# Altium PCB 400631.PcbDoc (part 5 of 8)
Units mm, origin at the board's own origin, x right, y up, seen from the top; angles counter-clockwise.
Board outline 136.53 x 63.5 mm, 4 copper layers (Top Layer, Mid-Layer 1, Mid-Layer 2, Bottom Layer), stack 1.52 mm thick; 366 components, 256 nets, 1485 pads, 1968 vias.
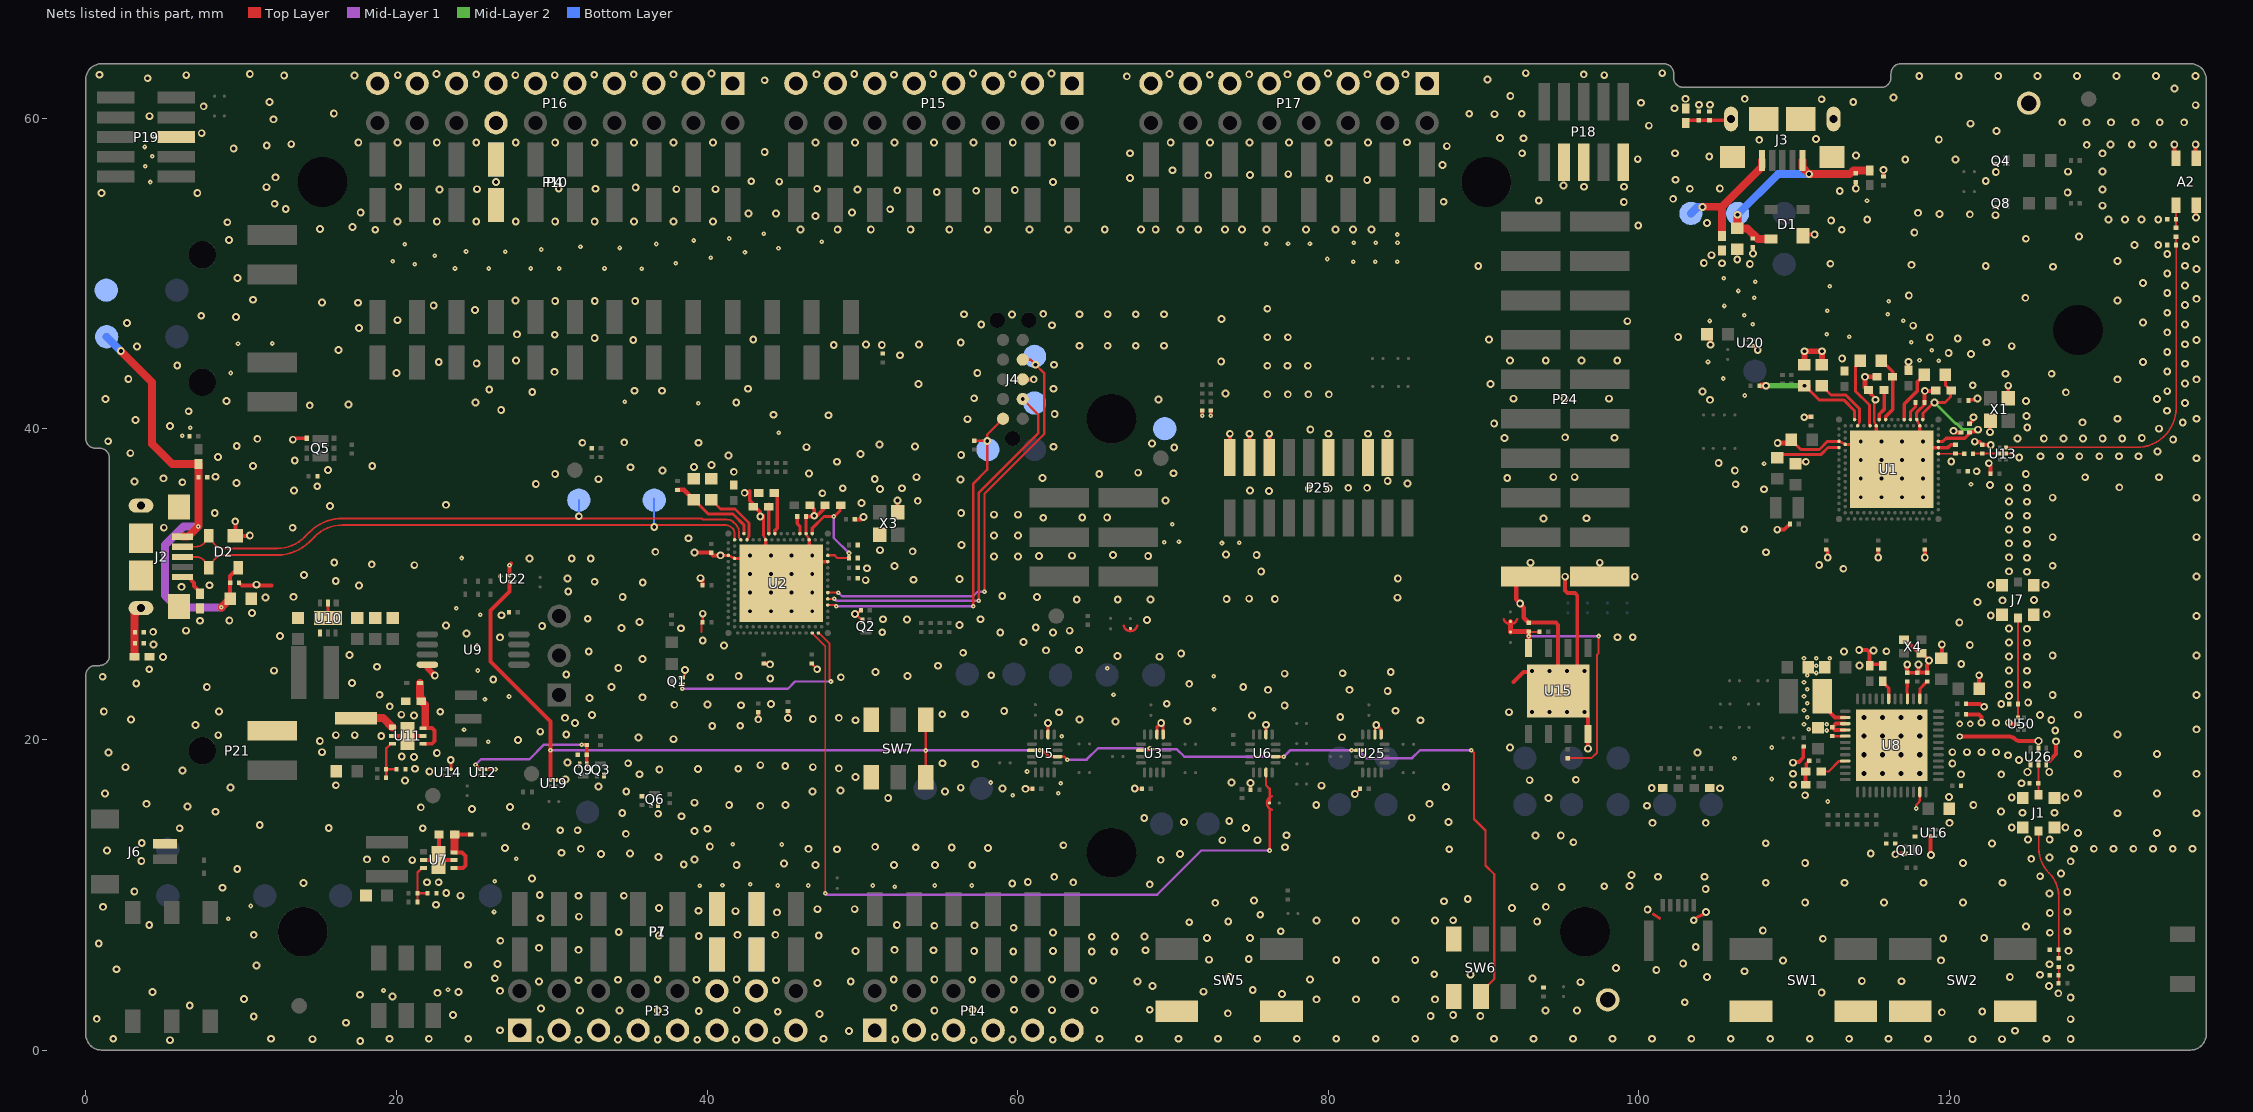
[diagram p5: the nets of this part, all layers, seen from the top]

## Via types
v1: diameter 0.5, hole 0.25, Top Layer to Bottom Layer, tented both sides, 1516 vias
v2: diameter 0.3, hole 0.1, Top Layer to Mid-Layer 1, tented top, 354 vias
v3: diameter 0.3, hole 0.1, Top Layer to Mid-Layer 1, tented both sides, 67 vias
v4: diameter 0.66, hole 0.33, Top Layer to Bottom Layer, tented both sides, 16 vias
v5: diameter 0.4, hole 0.2, Top Layer to Bottom Layer, tented both sides, 11 vias
v6: diameter 0.5, hole 0.3, Top Layer to Bottom Layer, tented both sides, 3 vias
v7: diameter 0.6, hole 0.3, Top Layer to Bottom Layer, tented both sides, 1 vias

## Nets (pads, with @x,y where several pads share a name; then routed paths per layer and width w, separated by ;. In a path a pad name is that pad's centre, name@x,y a point inside that pad or via, vN(x,y) a via of type N, cw(c..) or ccw(c..) an arc to the next point about the centre after c; other vN are vias at no path point) (continued)
DECA: C7.2 U1.A13 | length 4.1
  Top Layer w0.225: 115.478,40.939 U1.A13@115.478,40.589 115.478,40.939 ; 115.478,40.939 115.778,41.239 ; 115.478,40.939 115.778,41.239 ; 115.778,41.239 C7.2@115.778,42.494 115.778,41.239
DECN: C6.1 U1.A23 | length 2.5
  Top Layer w0.2: 117.478,41.101 U1.A23@117.478,40.589 117.478,41.101 ; 117.478,41.101 117.812,41.435 ; 117.478,41.101 117.812,41.435 ; 117.812,41.435 C6.1@117.812,41.689 117.812,41.435
DECR: C3.2 C4.1 L2.1 U1.A27 U1.G31 | length 15.1
  Top Layer w0.2: U1.A27@118.278,40.589 118.278,40.982 ; L2.1@119.728,43.464 119.728,42.814 C3.2@120.053,42.489 ; C3.2@120.103,42.439 120.09,42.451 C3.2@120.053,42.489 ; 118.278,40.982 v1@118.985,41.689 ; 118.278,40.982 v1@118.985,41.689 ; v1@118.985,41.689 119.703,41.689 ; v1@118.985,41.689 v1(119.028,41.689) 119.703,41.689 ; 119.578,39.189 U1.G31@119.278,39.189 119.578,39.189 ; 119.578,39.189 119.778,39.389 ; 119.578,39.189 119.778,39.389 ; 119.703,41.689 120.053,42.039 ; 119.703,41.689 120.053,42.039 ; 119.778,39.389 120.953,39.389 119.778,39.389 ; 120.053,42.039 C3.2@120.053,42.489 ; C4.1@121.393,39.804 120.978,39.389 C4.1@121.393,39.804 ; C4.1@121.393,39.804 121.618,39.804 C4.1@121.393,39.804
  Mid-Layer 2 w0.2: v1(119.028,41.689) 120.378,40.339 120.449,40.339 120.728,40.061 120.728,40.056 120.845,39.939 v1(121.828,39.939)
DECUSB: C18.1 U1.B6 | length 4.2
  Top Layer w0.187: C18.1@111.778,42.764 112.369,42.173 113.31,42.173 114.209,41.274 114.209,40.463 ; C18.1@112.078,42.764 C18.1@112.078,42.769 ; U1.B6@114.078,40.189 114.209,40.459
GND: A2.2 C1.1 C2.2 C3.1 C4.2 C5.1 C6.2 C7.1 C8.2 C9.2 C10.2 C11.2 C12.2 C13.2 C14.2 C15.2 C16.1 C17.2 C18.2 C19.2 C20.2 C21.1 C22.2 C23.2 C24.1 C25.2 C26.1 C27.2 C28.1 C29.1 C30.2 C31.2 C32.2 C33.2 C34.2 C35.2 C36.2 C37.2 C38.1 C39.1 C40.2 C41.1 C42.1 C43.2 C44.1 C45.1 C46.2 C47.1 C48.1 C49.2 C50.1 C51.1 C52.1 C53.1 C54.1 C55.1 C56.1 C57.1 C58.2 C59.1 C60.1 C61.1 C63.1 C64.1 C65.1 C66.1 C67.1 C68.2 C70.1 C71.2 C72.2 C73.2 C74.1 C75.1 C76.2 C77.2 C78.1 C79.1 C80.2 C81.1 C82.1 C83.1 C84.1 C85.1 C86.1 C87.1 C88.1 C89.2 C90.1 C91.1 C92.1 C93.1 C94.2 D1.1 D2.1 FB3.2 FB4.2 FB5.2 FB6.2 J1.2 J4.3 J6.1 J7.2 P1.6 P1.7 P4.7 P7.6 P7.7 P10.7 P13.1 P13.3 P13.5 P13.7 P13.9 P13.11 P13.12 P13.13 P13.14 P13.15 P14.1 P14.3 P14.5 P14.7 P14.9 P14.11 P15.1 P15.3 P15.5 P15.7 P15.9 P15.11 P15.13 P15.15 P16.1 P16.3 P16.5 P16.7 P16.9 P16.11 P16.13 P16.14 P16.15 P16.17 P16.19 P17.1 P17.3 P17.5 P17.7 P17.9 P17.11 P17.13 P17.15 P18.3 P18.5 P18.9 P19.5 P21.1 P24.19 P24.20 P25.3 P25.5 P25.9 P25.15 P25.17 P25.19 Q1.2 Q2.2 Q3.2 Q4.2 Q5.1 Q6.2 Q8.2 Q9.2 Q10.2 R4.1 R9.2 R11.2 R13.2 R25.2 R36.2 R37.2 R39.1 R41.2 R50.2 R52.2 R55.1 R56.1 R59.2 R61.2 R63.1 R70.2 R75.1 SB32.1 SW1.1 SW2.1 SW5.1 SW6.1 SW6.4 SW7.1 SW7.4 TP12.1 TP39.1 TP40.1 TP41.1 U1.104 U1.A25 U1.B12 U1.B26 U1.G1 U1.H2 U1.J31 U2.104 U2.A25 U2.B12 U2.B26 U2.G1 U2.H2 U2.J31 U3.5 U3.6 U5.6 U6.6 U7.2 U7.5 U7.7 U8.27 U8.28 U8.47 U8.49 U9.4 U10.2 U10.4 U10.7 U11.2 U11.5 U11.7 U12.B1 U13.2 U14.B1 U15.4 U15.9 U16.B1 U19.B1 U20.B1 U22.B1 U25.5 U25.6 U26.2 U26.5 U26.7 U50.2 X1.2 X1.4 X3.2 X3.4 X4.2 X4.4 | length 157.9
  Top Layer w0.15: v2(117.85,15.55) 117.85,15.78 118.025,15.955 118.025,15.983 118.078,16.036 U8.47@118.078,16.609 ; U13.2@123.625,38.4 124.012,38.4 124.187,38.225 v1@124.275,38.225
  Top Layer w0.152: Q1.2@38.399,23.974 38.583,24.157 v1(38.583,24.46) ; 39.649,26.924 39.649,27.482 C36.2@39.716,27.548 39.716,28.083 v1(39.726,28.092) ; v1(43.301,21.291) R9.2@43.301,21.741 ; v1(45.216,21.379) R13.2@45.216,21.828 ; C30.2@46.751,24.888 46.751,24.852 v1(47.092,24.511) ; v1(49.53,28.067) 49.572,28.067 Q2.2@50.003,27.636 ; v1@49.651,28.067 R25.2@49.905,28.321 ; v1(81.709,16.487) C24.1@82.036,16.815 ; v1@82.982,20.93 83.004,20.907 v1@83.004,20.85 ; U25.6@83.004,20.316 v1@83.004,20.85 ; v1(83.083,20.93) v1@83.004,20.85
  Top Layer w0.165: U2.A25@46.376,33.248 U2.B26@46.576,32.848 ; U1.A25@117.878,40.589 U1.B26@118.078,40.189 U1.A25@117.878,40.589
  Top Layer w0.187: v1(40.876,31.848) U2.G1@41.376,31.848 U2.H2@41.776,31.648 U2.104@42.476,31.648 ; 43.645,33.118 U2.B12@43.776,32.848 ; 43.645,33.122 v1@43.645,34.448 ; 114.981,42.21 115.147,42.045 115.147,40.463 ; 115.147,40.459 U1.B12@115.278,40.189 ; 110.421,38.67 C20.2@109.803,39.289 110.421,38.67 ; 110.421,38.67 111.618,38.67 ; 110.421,38.67 111.618,38.67 ; 111.618,38.67 112.137,39.189 ; 111.618,38.67 112.137,39.189 ; 112.137,39.189 U1.G1@112.878,39.189 ; 112.137,39.189 U1.G1@112.878,39.189 ; U1.G1@112.878,39.189 U1.H2@113.278,38.989 ; U1.G1@112.878,39.189 U1.H2@113.278,38.989 ; U1.H2@113.278,38.989 113.978,38.989 U1.H2@113.278,38.989
  Top Layer w0.2: U2.A25@46.376,33.248 C73.2@46.376,34.344 ; U1.A25@117.878,40.589 117.878,41.039 ; C6.2@118.382,41.689 C6.2@118.382,41.545 ; 117.878,41.039 117.953,41.114 ; 117.878,41.039 117.953,41.114 ; 117.953,41.114 117.953,41.116 ; 117.953,41.116 C6.2@118.382,41.545 ; 117.953,41.116 C6.2@118.382,41.545
  Top Layer w0.203: v1@13.284,39.385 Q5.1@14.168,39.385 ; U10.7@15.591,27.812 U10.2@15.591,28.787 ; U14.B1@23.517,18.082 v1@23.517,18.691 ; U12.B1@25.778,18.082 v2(26.387,18.082) ; U19.B1@30.319,17.386 30.859,17.386 v1(30.884,17.412) ; v1(60.503,16.815) C42.1@60.954,16.815 ; U5.6@61.947,20.316 v1(61.947,21.053) ; v1(67.539,16.84) 67.564,16.815 C41.1@67.999,16.815 ; U3.6@68.966,20.316 68.966,20.782 v1(69.24,21.057) 69.366,20.931 U3.5@69.366,20.316 ; C45.1@74.992,16.815 v1(74.992,17.184) ; U6.6@75.985,20.316 v1(75.985,20.941) ; v1(83.083,20.93) 83.404,20.609 U25.5@83.404,20.316 ; 100.94,8.738 101.321,8.484 ; 103.708,8.534 104.115,8.712 ; C52.1@107.326,51.683 107.326,51.297 v1(107.34,51.283) ; C20.2@109.598,39.084 C20.2@109.803,39.289
  Top Layer w0.225: U2.104@43.376,31.448 U2.104@44.776,30.048 U2.104@45.071,30.048 ; U2.104@43.776,31.448 U2.B12@43.776,32.848 ; U2.104@46.176,31.448 U2.104@46.576,31.448 ; U2.B26@46.576,32.848 U2.104@46.576,31.448 ; U2.J31@47.776,31.448 U2.104@46.576,31.448 ; v2(71.882,40.843) C28.1@71.882,41.168 ; v2(72.441,40.843) C29.1@72.441,41.168 ; U1.104@115.278,38.789 U1.B12@115.278,40.189 ; C2.2@117.278,43.739 117.278,44.238 v1(117.353,44.313) ; C2.2@117.353,43.739 117.353,44.314 v1@117.428,44.389 ; U1.B26@118.078,40.189 U1.104@118.078,38.789 ; U1.104@116.278,37.389 116.573,37.389 U1.104@116.278,37.389 ; U1.104@116.278,37.389 114.878,38.789 U1.104@116.278,37.389 ; U1.104@118.078,38.789 117.678,38.789 U1.104@118.078,38.789 ; U1.104@118.078,38.789 119.893,38.789 ; U1.104@118.078,38.789 U1.J31@119.278,38.789 119.893,38.789 ; 119.893,38.789 120.078,38.974 ; 119.893,38.789 120.078,38.974 ; 120.078,38.974 C1.1@120.378,38.974 120.078,38.974 ; v1(120.253,39.864) 120.363,39.754 v1(120.253,39.864) ; v1@121.728,41.864 v1(121.803,41.939) v1@121.728,41.864
  Top Layer w0.25: U11.2@19.751,20.218 U11.7@20.726,20.218 U11.5@21.701,20.218 ; U7.2@21.751,12.225 U7.7@22.726,12.225 ; C66.1@22.75,13.875 22.75,12.249 U7.7@22.726,12.225 ; U7.5@23.701,12.225 U7.7@22.726,12.225 ; U22.B1@27.283,30.553 v2(27.283,31.22) v2@27.381,31.318 ; Q9.2@31.799,18.39 Q9.2@31.804,18.384 ; v1(39.201,32.023) 40.208,32.023 C34.2@40.218,32.013 ; v1(39.573,30.378) 39.578,30.378 39.706,30.251 39.706,29.933 C35.2@39.716,29.923 ; C34.2@40.276,32.013 C34.2@40.218,32.013 ; v1(40.876,31.848) 40.383,31.848 C34.2@40.218,32.013 ; C74.1@42.976,35.073 43.401,34.648 v1@43.401,34.498 ; C37.2@43.653,24.888 43.997,24.888 v1(44.053,24.832) ; C73.2@46.376,34.344 46.847,34.344 v1(46.901,34.398) ; C25.2@46.626,35.073 46.901,34.798 v1(46.901,34.398) ; C26.1@47.601,35.073 47.601,34.912 47.088,34.398 v1(46.901,34.398) ; C33.2@49.511,34.165 49.917,34.165 v1(50.076,34.323) ; 91.925,23.7 92.571,24.346 93.055,24.346 v1(93.108,24.4) ; v1(104.608,45.404) C67.1@104.608,46.076 ; U20.B1@107.363,45.342 v1(107.645,45.06) ; v1(108.9,33.5) 109.354,33.5 109.693,33.839 109.708,33.839 109.718,33.849 C13.2@109.718,33.864 ; v1@109.95,18.5 109.99,18.54 110.294,18.54 110.575,18.821 110.575,19.407 110.575,19.53 110.585,19.54 R4.1@110.6,19.54 ; v1@110.578,40.714 v1@110.638,40.774 ; v1@110.668,40.716 110.668,40.744 v1@110.638,40.774 ; C64.1@110.728,17.078 C58.2@110.728,17.934 110.768,17.974 110.768,18.434 C75.1@110.968,18.634 ; C12.2@111.078,40.774 v1@110.638,40.774 ; C82.1@111.931,24.606 C82.1@111.95,24.625 ; C14.2@112.051,32.229 112.151,32.129 v1(112.151,31.714) ; v1(114.175,25.75) 114.7,25.75 114.853,25.597 C88.1@114.853,24.734 ; U8.49@114.728,21.009 U8.49@115.528,20.209 ; C7.1@114.778,42.414 114.981,42.21 ; C88.1@114.853,24.834 C87.1@115.752,24.834 ; v1(115.404,31.714) C15.2@115.404,32.229 ; X4.4@117.05,26.4 117.2,26.25 117.339,26.25 117.889,25.7 118.05,25.7 X4.2@118.2,25.55 118.25,25.55 118.4,25.4 118.4,25.35 v1(118.675,25.075) 118.627,25.027 118.627,24.885 118.545,24.804 C84.1@118.545,24.301 ; C86.1@117.29,24.291 C85.1@117.899,24.291 ; v1(118,24.825) 118,24.38 117.937,24.316 117.937,24.301 117.927,24.291 C85.1@117.912,24.291 117.922,24.301 C84.1@118.545,24.301 ; C6.2@118.378,41.689 118.378,42.439 C3.1@119.078,42.439 ; v1(118.403,31.714) C8.2@118.403,32.229 ; C84.1@118.549,24.291 118.549,24.298 C84.1@118.545,24.301 ; C83.1@119.45,25.225 119.5,25.275 v1(119.5,26.1) ; C79.1@121.063,21.613 121.887,21.613 122.05,21.45 v1@122.05,21.103 ; C80.2@121.063,22.284 121.974,22.284 122.157,22.1 v1(122.225,22.1) ; C4.2@121.278,40.324 121.53,40.577 v1@121.53,40.763 ; C81.1@121.9,23.275 v1(121.9,24.125) ; v1(122.525,37.775) 122.525,37.707 122.64,37.592 R41.2@122.64,37.1 ; v1(122.606,39.776) 122.606,40.496 X1.4@122.628,40.518 ; v1(123.774,42.774) 123.774,41.972 X1.2@123.778,41.968 ; 126.418,18.618 126.85,19.05 v1(126.85,19.875) ; v1@120.363,39.754 C10.2@120.728,39.754 v1@120.363,39.754 ; C11.2@121.213,41.864 121.728,41.864 C11.2@121.213,41.864
  Top Layer w0.254: v1(9.627,34.036) 9.63,34.033 D2.1@9.63,33.105 10.55,33.105 v1(10.566,33.122) ; C54.1@9.876,30.074 10.054,29.896 11.966,29.896 ; 42.751,35.998 42.751,35.378 C74.1@42.976,35.153 ; X3.4@51.104,33.155 X3.4@51.126,33.178 ; v1(52.272,35.382) 52.272,34.631 X3.2@52.276,34.628 ; J4.3@60.325,43.18 v1(61.036,43.18) ; P25.19@73.66,38.145 v1(73.66,39.675) ; P25.17@74.93,38.145 v1(74.93,39.675) ; P25.15@76.2,38.145 v1(76.2,39.675) ; C92.1@92.9,27.51 94.651,27.51 94.8,27.361 U15.9@94.8,23.12 96.025,24.345 96.025,29.276 95.876,29.425 95.399,29.425 95.25,29.574 v1(95.25,30.475) ; U15.9@95.235,23.134 96.673,21.696 96.673,21.43 96.705,21.398 U15.4@96.705,20.35 96.715,20.34 96.715,19.41 v1(96.725,19.4) ; C19.2@110.078,37.739 110.21,37.871 v1(110.744,37.871) ; D1.1@110.556,52.41 110.657,52.512 v1(111.313,52.512) ; C76.2@112.45,20.785 C76.2@112.465,20.785 ; U8.28@113.278,20.609 112.626,20.609 112.473,20.762 112.473,20.777 C76.2@112.465,20.785 ; U8.27@113.278,21.009 112.699,21.009 112.475,20.785 C76.2@112.465,20.785 ; v1(113.963,55.467) C47.1@113.963,55.874 ; C48.1@115.748,56.241 v1(115.748,56.667) ; v1(116.5,12.6) 116.567,12.6 116.617,12.65 Q10.2@117.125,12.65 ; v1(117.275,24.825) 117.275,24.758 117.225,24.708 117.225,24.553 117.252,24.526 117.252,24.299 117.26,24.291 C86.1@117.29,24.291 ; U16.B1@118.775,13.775 118.775,13.419 118.773,13.417 118.773,13.083 118.775,13.081 118.775,12.575 v1(118.8,12.55) ; v5(120.65,20.184) 123.817,20.184 cw(c123.817,19.642) 124.199,20.026 ; v1(121.615,39.167) 121.641,39.141 121.923,39.141 C21.1@122.098,38.966 122.634,38.966 v1(122.65,38.95) ; v1(122.05,21.075) 122.05,21.103 v1@122.059,21.094 ; v1@123.75,21.075 123.797,21.028 123.971,21.028 123.999,21 U50.2@124.4,21 ; 124.2,20.025 ccw(c124.509,20.334) 124.509,19.897 v6(125.718,19.897) ; v1(134.468,58.29) 134.468,57.4 A2.2@134.575,57.4 ; v1(135.84,58.29) 135.84,57.4 A2.2@135.875,57.4 ; v1(135.867,53.6) 135.867,54.4 A2.2@135.875,54.4
  Top Layer w0.3: C92.1@92.9,27.51 92.575,27.835 92.575,28.474 92.35,28.699 92.35,28.772 92.1,29.022 92.1,29.972 92.608,30.48 P24.19@93.027,30.48
  Top Layer w0.305: v1(108.928,39.084) C20.2@109.598,39.084 ; C7.1@114.778,42.414 114.553,42.639 v1(114.553,43.339) 114.558,43.344 C5.1@115.328,43.344
  Top Layer w0.381: U9.4@21.993,24.806 21.993,24.591 v1(22.479,24.105) ; C17.2@110.653,44.119 v1(110.653,44.989) 111.708,44.989 v1@111.778,44.919 ; C18.2@111.778,44.119 v1@111.778,44.919 ; v1(111.778,44.989) v1@111.778,44.919
  other v1: 17.675,0.575 5.436,0.635 44.475,0.635 57.175,0.635 31.725,0.66 39.37,0.66 62.255,0.66 14.6,0.7 29.261,0.686 34.265,0.686 36.83,0.686 41.859,0.686 52.121,0.686 59.665,0.686 121.475,0.7 123.365,0.7 1.772,0.723 11.932,0.723 19.552,0.723 22.092,0.723 24.632,0.723 47.492,0.723 65.272,0.723 67.812,0.723 70.352,0.723 72.892,0.723 75.432,0.723 77.972,0.723 80.512,0.723 83.052,0.723 85.592,0.723 88.132,0.723 90.672,0.723 93.212,0.723 95.752,0.723 98.292,0.723 100.832,0.723 103.372,0.723 105.912,0.723 108.452,0.723 110.992,0.723 113.532,0.723 116.072,0.723 118.612,0.723 126.232,0.723 127.791,0.718 54.661,0.838 49.149,1.219 124.206,1.245 26.67,1.27 16.764,1.753 127.791,1.988 0.711,2.007 10.82,2.159 86.589,2.184 89.789,2.184 23.647,2.261 88.036,2.261 47.244,2.311 73.533,2.362 119.5,2.425 44.552,2.464 122.1,2.475 39.472,2.515 31.826,2.54 34.366,2.54 36.83,2.54 54.635,2.54 93.98,2.54 96.012,2.54 41.91,2.565 62.205,2.565 64.948,2.565 57.099,2.591 59.766,2.591 68.504,2.591 29.312,2.667 52.019,2.718 6.696,2.87 102.946,3.073 79.242,3.263 81.782,3.263 84.322,3.263 86.862,3.263 10.185,3.277 127.791,3.383 19.75,3.45 17.653,3.556 77.013,3.607 127,3.65 22.657,3.683 111.76,3.708 4.309,3.734 24.003,3.734 71.958,3.759 26.67,3.81 75.133,3.861 68.682,4.115 126.4,4.125 47.117,4.318 96.241,4.369 29.185,4.42 49.251,4.42 67.716,4.42 116.9,4.425 114.35,4.45 64.846,4.47 31.725,4.496 44.45,4.496 34.265,4.521 39.319,4.521 57.074,4.521 36.83,4.547 41.91,4.547 52.019,4.547 54.635,4.547 59.741,4.547 62.205,4.547 78.816,4.547 93.142,4.597 26.34,4.623 73.635,4.699 104.375,4.7 123.876,4.699 125.825,4.85 89.154,4.851 86.817,4.877 106.8,5.075 101.117,5.156 1.975,5.2 98.527,5.283 127.791,5.298 10.998,5.436 24.613,5.486 126.425,5.525 26.518,5.537 102.845,5.563 109.271,5.766 119.45,5.775 80.512,5.803 83.052,5.803 85.592,5.803 72.314,5.817 74.879,5.867 59.715,6.35 64.77,6.35 66.218,6.35 49.555,6.375 57.201,6.375 62.281,6.375 127.659,6.386 54.585,6.426 68.224,6.426 31.725,6.452 52.07,6.452 29.185,6.579 103.657,6.629 0.838,6.858 26.695,7.036 111.836,7.163 119.583,7.188 72.187,7.214 74.955,7.214 122.225,7.214 64.77,7.29 66.269,7.315 68.174,7.315 39.472,7.341 36.906,7.366 47.193,7.366 10.82,7.417 41.961,7.417 44.399,7.417 126.453,7.553 62.281,7.569 34.315,7.595 76.937,7.645 127.597,7.647 107.975,7.7 59.741,7.874 124.925,7.95 54.635,8.001 57.226,8.026 4.089,8.052 52.222,8.052 71.044,8.23 73.558,8.28 93.447,8.28 79.242,8.343 81.782,8.343 84.322,8.343 86.862,8.343 88.036,8.357 103.53,8.357 29.286,8.484 31.75,8.585 75.616,8.712 126.453,8.815 44.501,8.865 104.318,8.89 127.597,8.909 41.834,8.941 39.446,8.966 100.559,9.042 47.117,9.068 49.505,9.068 36.906,9.144 91.821,9.144 1.118,9.22 94.005,9.22 22.549,9.355 72.72,9.474 110.7,9.5 115.78,9.5 120.86,9.5 87.452,9.576 75.209,9.627 88.976,9.728 24.123,9.939 31.725,9.931 34.646,9.931 29.235,9.982 126.434,10.077 23.209,10.117 127.578,10.171 3.132,10.211 104.292,10.363 8.8,10.45 95.021,10.49 93.269,10.516 97.765,10.541 99.39,10.566 68.504,10.668 59.65,10.725 14.025,10.75 108.16,10.77 113.24,10.77 118.32,10.77 123.4,10.77 21.975,10.8 22.725,10.8 63.576,10.795 60.655,10.82 28.727,11.049 62.357,11.151 101.22,11.154 104.217,11.154 125.829,11.184 99.525,11.275 127.165,11.363 9.754,11.659 41.91,11.913 46.99,11.913 52.032,11.913 54.686,11.913 57.074,11.913 38.5,11.95 44.958,12.014 110.7,12.04 120.86,12.04 127.791,12.148 3.581,12.167 21.025,12.225 69.215,12.243 18.104,12.276 19.323,12.276 39.192,12.268 125.254,12.307 126.428,12.388 36.881,12.421 33.175,12.625 70.46,12.624 35.05,12.65 114.925,12.65 30.632,12.7 1.372,12.852 48.362,12.929 87.782,12.929 31.877,12.954 46.533,12.954 128.016,12.955 129.286,12.955 130.556,12.955 131.826,12.955 133.096,12.955 134.366,12.955 135.636,12.955 27,13.005 58.09,13.005 55.753,13.03 53.442,13.056 77.216,13.056 50.825,13.081 40.183,13.106 62.941,13.183 122.725,13.3 108.16,13.31 3.607,13.335 95.775,13.375 73.177,13.513 75.438,13.513 125.051,13.553 126.441,13.555 93.345,13.804 94.971,13.804 77.3,13.825 34.773,13.919 128.27,13.97 133.35,13.97 39.192,14.097 30.55,14.15 31.674,14.148 40.03,14.249 6.05,14.275 21.7,14.275 15.65,14.3 74.7,14.3 124,14.325 127.45,14.325 28.346,14.402 11.204,14.484 100.875,14.625 104.3,14.625 120,14.625 70.714,14.681 87.732,14.681 73.625,14.75 68.148,14.935 85.369,14.961 38.35,15.05 36.855,15.215 130.81,15.24 135.89,15.24 34.544,15.265 124.7,15.275 126.75,15.275 8.357,15.342 123.3,15.35 24.874,15.518 21.575,15.625 27.325,15.65 6.553,15.672 43.434,15.723 100.525,15.725 41.427,15.773 45.06,15.773 79.223,15.773 121.525,15.775 3.912,15.85 86.512,15.85 39.192,15.926 51.664,16.231 94.183,16.231 124,16.25 127.45,16.25 119.954,16.282 110.7,16.4 1.245,16.51 128.27,16.51 133.35,16.51 34.798,16.637 46.787,16.637 55.321,16.637 48.59,16.713 59.03,16.84 105.225,16.85 100.825,16.875 9.325,16.9 56.337,16.891 87.579,16.942 33.02,16.967 79.553,17.018 16.104,17.043 109.925,17.075 124.625,17.175 73.762,17.221 20.549,17.348 92.964,17.374 95.936,17.399 49.555,17.577 120.725,17.75 123.325,17.75 35.662,17.755 109.925,17.788 130.81,17.78 135.89,17.78 22.123,17.932 6.225,18 36.932,18.059 39.421,18.085 21.209,18.11 42.012,18.11 48.489,18.136 2.565,18.212 46.812,18.212 45.034,18.288 43.434,18.339 57.277,18.415 120.175,18.45 34.925,18.466 55.169,18.466 109.925,18.5 31.013,18.517 23.499,18.673 124.475,18.675 21.133,18.872 20.345,18.898 123.75,18.975 128.27,19.05 133.35,19.05 22.606,19.126 103.775,19.15 1.473,19.152 120.175,19.175 121.112,19.175 122.05,19.175 122.986,19.175 15.215,19.177 91.7,19.475 15.075,19.9 27.838,19.964 37.846,20.015 35.585,20.117 80.874,20.142 19.025,20.218 8.534,20.269 16.104,20.269 17.323,20.269 30.937,20.32 130.81,20.32 29.261,20.498 126.8,20.575 135.89,20.645 40.335,20.853 42.139,20.879 7.075,20.925 31.496,21.057 122.986,21.075 123.8,21.075 66.299,21.145 70.942,21.184 49.555,21.234 85.928,21.234 126.55,21.25 2.921,21.285 63.983,21.285 46.812,21.311 30.861,21.387 48.489,21.387 80.772,21.438 21.133,21.539 75.082,21.539 32.588,21.565 125.825,21.575 20.32,21.59 128.27,21.59 55.143,21.615 56.617,21.615 62.662,21.742 91.625,21.75 93.108,21.75 94.239,21.75 95.369,21.75 96.5,21.75 22.825,21.775 1.168,21.793 8.585,21.793 59.131,21.819 84.328,21.844 19.575,22.125 77.191,22.174 42.189,22.2 37.897,22.225 40.03,22.25 123.325,22.275 44.12,22.276 69.599,22.295 125.058,22.375 32.436,22.657 35.839,22.708 123.825,22.8 18.925,22.875 126.635,22.86 135.89,22.86 83.82,23.114 76.124,23.19 81.356,23.19 7.798,23.368 33.858,23.368 74.524,23.368 124.983,23.517 123.817,23.542 71.05,23.575 3.251,23.597 17.15,23.625 26.238,23.851 44.069,23.927 40.208,24.003 48.616,24.003 1.092,24.028 42.037,24.079 52.908,24.079 58.3,24.125 30.937,24.181 77.191,24.232 80.924,24.257 50.851,24.333 84.023,24.333 94.239,24.4 95.369,24.4 96.5,24.4 12.125,24.425 124.983,24.417 123.817,24.442 4.089,24.511 34.29,24.587 18.75,24.675 54.864,24.74 114.2,24.75 120.75,24.85 35.839,25.171 4.978,25.298 124.983,25.317 69.139,25.324 123.817,25.342 66.421,25.375 126.635,25.4 135.89,25.4 16.975,25.425 70.525,25.525 56.49,25.578 113.2,25.65 32.385,25.654 115.925,25.675 115.1,25.725 61.824,25.73 63.957,25.756 41.097,26.035 121.3,26.075 4.369,26.111 124.983,26.217 123.817,26.242 60.376,26.264 39.726,26.365 26.67,26.568 98.625,26.575 99.6,26.575 12.509,26.653 24.511,26.822 58.877,26.873 62.281,26.873 51.283,26.899 4.343,26.924 6.452,27 63.348,27 124.983,27.117 123.817,27.142 38.329,27.153 34.493,27.178 61.163,27.203 23.2,27.325 29.388,27.305 56.261,27.356 120.625,27.525 35.662,27.559 7.366,27.635 9.246,27.661 68.326,27.686 52.883,27.711 51.333,27.737 57.607,27.737 32.324,27.762 135.89,27.94 122.65,27.975 26.772,27.991 126.25,28.05 10.708,28.144 42.776,28.248 44.109,28.248 45.443,28.248 46.776,28.248 92.35,28.75 121.8,28.85 123.4,28.95 125.425,28.975 63.805,29.007 66.446,29.007 68.555,29.007 73.457,29.032 76.556,29.032 74.905,29.058 84.45,29.125 11.582,29.134 13.384,29.178 34.569,29.159 61.239,29.159 59.004,29.235 42.776,29.448 44.109,29.448 45.443,29.448 46.776,29.448 31.064,29.515 6.172,29.82 17.6,29.9 7.976,29.921 10.988,29.959 122.65,29.95 126.175,29.95 35.865,30.099 32.766,30.15 16.1,30.2 50.216,30.251 53.289,30.277 56.261,30.328 84.475,30.35 31.013,30.353 99.725,30.475 135.89,30.48 14.05,30.575 42.776,30.648 44.109,30.648 45.443,30.648 46.776,30.648 75.675,30.8 124.983,30.795 123.817,30.82 113.157,30.988 50.292,31.013 52.07,31.166 126.635,31.175 21.158,31.217 111.6,31.225 18.415,31.267 93.025,31.375 97.475,31.375 16.002,31.394 28.575,31.648 31.293,31.648 32.512,31.648 124.983,31.695 123.817,31.72 58.471,31.775 60.02,31.775 61.366,31.801 68.402,31.801 42.776,31.848 44.109,31.848 45.443,31.848 46.776,31.848 63.5,31.826 66.142,31.877 75.387,31.877 73.406,31.902 108.175,32.05 36.674,32.074 53.238,32.106 51.13,32.182 56.388,32.512 124.983,32.595 123.817,32.62 38.811,32.948 126.635,33.02 135.89,33.02 58.471,33.122 60.02,33.122 124.983,33.495 123.817,33.52 106.782,33.528 13.325,33.625 5.029,33.63 93.853,34.214 96.622,34.239 61.646,34.265 64.16,34.29 65.761,34.29 43.426,34.348 124.983,34.395 123.817,34.42 58.471,34.468 60.02,34.468 8.306,34.569 56.363,34.569 15.725,35.025 23.2,35.1 49.951,35.223 124.983,35.295 123.817,35.32 53.569,35.357 69.52,35.382 126.635,35.56 135.89,35.56 114.278,35.589 115.611,35.589 116.944,35.589 118.278,35.589 47.426,35.848 42.426,35.873 76.175,35.992 13.411,36.017 74.955,36.017 108.05,36.1 51.129,36.119 48.741,36.169 52.551,36.169 78.74,36.144 80.035,36.144 81.28,36.195 82.499,36.195 124.983,36.195 123.817,36.22 130.925,36.225 14.91,36.297 122.6,36.375 106.225,36.425 28.981,36.449 85.09,36.474 9.703,36.5 6.223,36.551 3.15,36.601 83.82,36.627 56.312,36.728 33.02,36.754 50.798,36.766 114.278,36.789 115.611,36.789 116.944,36.789 118.278,36.789 5.004,36.805 61.595,36.83 91.516,36.83 128.725,36.875 133.475,36.875 53.492,36.881 94.488,36.881 95.86,36.881 8.357,36.906 30.226,37.084 65.253,37.084 124.908,37.092 46.558,37.109 70.028,37.135 67.759,37.17 41.726,37.223 121.742,37.262 37.135,37.313 106.172,37.313 15.596,37.338 35.077,37.516 39.167,37.541 10.775,37.6 18.45,37.6 40.284,37.668 105.131,37.795 48.362,37.871 120.103,37.889 13.462,37.948 114.278,37.989 115.611,37.989 116.944,37.989 118.278,37.989 135.89,38.1 124.48,38.15 8.509,38.176 125.854,38.228 127.116,38.228 128.35,38.228 129.64,38.228 130.902,38.228 132.164,38.229 41.377,38.278 56.363,38.303 49.886,38.379 2.875,38.425 133.388,38.535 70.079,38.786 46.406,38.811 62.306,38.837 53.391,38.862 9.728,38.887 51.105,38.989 68.656,39.04 31.975,39.1 39.45,39.1 34.675,39.125 114.278,39.189 115.611,39.189 116.944,39.189 118.278,39.189 1.448,39.192 13.335,39.294 134.391,39.301 11.05,39.35 124.365,39.375 126.065,39.372 127.327,39.372 128.589,39.372 129.851,39.372 131.113,39.372 91.338,39.395 132.375,39.403 98.425,39.421 95.25,39.446 80.01,39.675 82.55,39.675 83.82,39.675 78.842,39.954 133.484,40.004 125,40.075 5.425,40.175 90.678,40.337 135.007,40.402 128.549,40.411 3.2,40.564 56.769,40.615 130.81,40.64 135.89,40.64 121.53,40.738 110.642,40.742 124.943,40.818 47.828,40.869 44.275,40.9 62.382,40.945 6.629,41.123 133.997,41.157 26.746,41.199 14.427,41.504 16.916,41.554 135.157,41.655 25.095,41.681 41.885,41.681 9.068,41.783 124.917,41.783 104.572,41.859 115.228,41.864 69.063,41.885 1.27,41.91 133.35,41.91 91.923,41.935 95.199,41.935 98.069,41.935 57.201,41.961 76.073,42.215 77.394,42.215 78.715,42.215 80.035,42.215 73.381,42.266 127.483,42.342 28.753,42.367 104.089,42.393 118.403,42.439 134.013,42.419 35.331,42.443 37.109,42.443 25.984,42.52 42.647,42.57 62.306,42.57 121.488,42.799 53.619,42.875 90.449,42.875 135.157,42.917 130.81,43.18 135.89,43.18 2.743,43.205 123.596,43.536 126.568,43.536 20.015,43.586 57.404,43.586 30.175,43.663 134.013,43.681 76.073,44.052 77.377,44.052 78.681,44.052 5.893,44.069 62.332,44.12 135.157,44.179 25.171,44.196 22.733,44.298 132.45,44.3 73.101,44.323 27.711,44.399 91.694,44.399 93.997,44.399 96.3,44.399 98.603,44.399 113.081,44.526 52.426,44.729 121.378,44.814 119.939,44.882 134.013,44.943 16.281,45.06 3.302,45.288 124.003,45.314 63.983,45.339 65.794,45.339 67.606,45.339 69.418,45.339 48.158,45.39 51.257,45.39 50.241,45.415 53.645,45.415 135.157,45.441 56.337,45.542 122.377,45.568 35.255,45.72 135.89,45.72 42.977,45.745 90.348,45.745 120.525,45.8 32.766,45.847 76.073,45.889 77.394,45.889 118.725,45.875 102.525,45.9 30.201,46.05 27.762,46.076 134.013,46.205 17.602,46.482 117.653,46.634 62.205,46.66 135.157,46.703 57.658,46.711 2.667,46.812 132.45,46.84 99.25,46.925 20.066,46.99 73.127,47.066 9.677,47.193 7.442,47.269 59.639,47.346 56.54,47.371 63.983,47.371 65.794,47.371 67.606,47.371 69.418,47.371 61.646,47.396 134.013,47.467 25.07,47.65 76.073,47.727 22.403,47.93 135.157,47.965 17.526,48.108 15.215,48.133 30.225,48.225 32.775,48.225 35.375,48.225 27.675,48.25 130.81,48.26 10.775,48.3 135.89,48.36 124.875,48.425 117.375,48.575 134.013,48.729 135.157,49.227 132.45,49.38 9.779,49.708 134.013,49.991 135.89,50.275 126.65,50.425 89.65,50.475 122.325,50.475 135.157,50.489 117.55,50.55 107.137,50.597 112.319,50.622 105.35,50.65 104.175,50.675 130.81,50.8 106.324,50.902 104.675,51.175 134.013,51.253 135.224,51.749 131.9,51.825 133.428,51.825 9.22,52.146 135.85,52.2 124.906,52.228 128.325,52.375 117.729,52.629 18.644,52.807 113.055,52.807 46.025,52.832 48.412,52.832 50.546,52.832 53.111,52.832 55.601,52.832 58.09,52.832 60.757,52.832 63.271,52.832 65.608,52.832 67.945,52.832 68.885,52.832 70.485,52.832 71.628,52.832 73.355,52.832 74.447,52.832 76.022,52.832 78.562,52.832 80.467,52.832 81.585,52.832 82.779,52.832 15.088,52.857 17.17,52.984 99.95,53.075 104.375,53.25 9.119,53.289 20.066,53.34 22.606,53.34 25.146,53.34 27.686,53.34 30.226,53.34 32.766,53.34 35.306,53.34 37.846,53.34 40.386,53.34 112.375,53.4 114.7,53.475 130.226,53.475 131.293,53.475 132.361,53.475 133.428,53.475 46.99,53.696 122.95,53.75 121.3,53.8 119.355,53.823 42.672,53.848 44.45,53.848 117.958,53.899 17.704,53.924 49.327,53.924 51.791,54.127 12.878,54.153 129.85,54.36 12.167,54.483 99.025,54.6 87.427,54.61 93.548,54.686 102.2,54.8 1.016,55.169 7.188,55.169 127.6,55.2 54.788,55.245 112.928,55.296 57.328,55.321 52.248,55.347 59.817,55.372 22.784,55.397 49.682,55.397 129.85,55.4 25.197,55.423 38.024,55.423 40.538,55.423 30.455,55.448 32.817,55.448 47.092,55.448 103.275,55.45 105.207,55.474 35.408,55.524 11.633,55.55 20.117,55.575 96.469,55.575 99.035,55.575 95.148,55.651 26.416,55.89 62.281,55.88 44.653,55.905 42.85,55.931 122.325,55.95 82.499,56.007 102.35,56.025 80.061,56.109 67.234,56.134 12.217,56.185 72.263,56.312 74.955,56.337 77.419,56.388 122.975,56.525 127.625,56.55 129.85,56.565 69.977,56.642 87.351,56.972 120.375,57.325 117.145,57.328 99.924,57.353 104.521,57.531 113.97,57.582 129.85,57.73 67.234,57.734 92.481,57.734 102.311,57.734 43.713,57.81 9.525,58.039 87.63,58.191 11.659,58.242 128.825,58.275 130.35,58.29 131.723,58.29 133.095,58.29 13.233,58.318 17.551,58.42 20.066,58.42 22.606,58.42 25.146,58.42 27.686,58.42 30.226,58.42 32.766,58.42 35.306,58.42 37.846,58.42 40.386,58.42 46.99,58.42 49.53,58.42 52.07,58.42 54.61,58.42 57.15,58.42 59.69,58.42 62.23,58.42 69.85,58.42 72.39,58.42 74.93,58.42 77.47,58.42 80.01,58.42 82.55,58.42 85.065,58.445 107.747,58.598 119.304,58.623 111.404,58.649 92.558,58.699 91.059,58.725 7.467,59.03 123.025,59.175 100.635,59.512 121.336,59.639 127.25,59.725 128.82,59.725 130.39,59.725 131.96,59.725 133.53,59.725 135.1,59.725 12.09,59.919 4.115,60.122 90.7,60.25 89.075,60.275 92.456,60.274 15.977,60.3 102.286,60.63 7.595,60.757 135.84,60.83 103.861,60.858 104.572,60.858 100.127,60.985 11.831,61.041 113.792,61.036 111.76,61.214 102.997,61.239 106.807,61.239 116.383,61.316 91.719,61.417 134.475,61.9 43.713,62.433 90.246,62.484 3.988,62.56 67.031,62.687 118.045,62.715 120.585,62.715 123.125,62.715 125.665,62.715 128.205,62.715 130.745,62.715 133.285,62.715 135.825,62.715 12.776,62.738 17.297,62.738 6.477,62.763 20.091,62.763 27.661,62.763 30.201,62.763 97.765,62.763 0.889,62.789 32.741,62.789 52.045,62.789 72.365,62.789 25.146,62.814 35.281,62.814 37.846,62.814 47.041,62.814 59.665,62.814 74.905,62.814 77.368,62.814 82.525,62.814 84.963,62.814 96.444,62.814 10.566,62.84 22.581,62.84 49.479,62.84 54.559,62.84 69.774,62.84 40.284,62.865 57.125,62.865 62.179,62.865 79.985,62.865 92.71,62.89 101.498,62.89
  other v2: 19.177,3.835 23.325,3.886 9.169,8.458 26.289,8.89 10.617,9.271 52.095,10.516 39.522,10.566 44.552,10.592 46.507,10.592 50.673,10.592 54.661,10.592 57.048,10.592 40.996,10.617 42.774,10.668 26.34,10.871 27.711,12.319 44.806,13.233 41.656,13.259 112.15,16 59.69,16.408 62.611,16.535 62.763,17.17 58.268,17.221 108.55,17.45 60.604,17.932 106.15,18.775 108.55,19.475 25.908,19.837 62.84,20.193 112.1,20.575 24.359,20.625 110.925,20.65 110.625,20.975 112.1,20.975 110.825,21.425 110.625,21.875 72.644,21.946 110.825,22.325 25.705,22.581 27.254,22.758 110.625,22.775 66.175,22.875 110.825,23.225 110.625,23.675 72.619,24.054 110.825,24.125 111.419,24.275 25.248,24.435 65.761,24.587 111.419,24.75 110.625,25.225 111.419,25.225 112.275,25.225 25.197,26.06 25.4,28.016 23.851,28.448 26.68,30.505 24.206,31.674 73.152,32.639 74.27,32.664 69.444,32.69 70.383,32.715 69.952,33.858 121.375,36.425 108.052,37.744 6.223,39.548 44.628,39.751 6.731,40.056 39.446,41.631 34.696,41.732 106.807,42.139 105.435,43.231 9.347,43.586 104.445,44.298 119.293,44.374 118.059,44.399 118.847,45.06 9.804,45.466 12.014,45.491 117.526,45.568 113.538,45.923 112.09,46.076 107.315,46.736 104.546,46.939 117.025,46.95 106.782,47.295 116.025,47.375 112.116,47.6 105.486,47.904 116.078,48.209 107.417,48.438 106.401,48.87 112.293,49.174 107.493,49.454 105.461,49.682 35.789,50.292 23.774,50.317 25.959,50.317 28.651,50.317 30.48,50.317 33.401,50.317 21.184,50.597 37.998,50.648 81.61,50.749 83.02,50.749 84.43,50.749 19.761,50.775 79.934,50.927 40.234,51.003 22.479,51.13 42.443,51.359 27,51.384 24.486,51.41 29.337,51.537 44.602,51.613 34.392,51.638 31.852,51.714 20.549,51.867 36.728,51.892 75.997,51.918 77.406,51.918 78.816,51.918 81.636,51.968 83.045,51.968 84.455,51.968 47.396,52.045 39.141,52.121 41.427,52.248 84.43,52.502 43.663,52.553 114.681,54.686 4.166,55.88 3.835,56.896 4.293,57.531 3.81,58.141 4.293,58.801
  other v4: 114.478,17.809 115.678,17.809 116.878,17.809 118.078,17.809 114.478,19.009 115.678,19.009 116.878,19.009 118.078,19.009 114.478,20.209 115.678,20.209 116.878,20.209 118.078,20.209 114.478,21.409 115.678,21.409 116.878,21.409 118.078,21.409
  other v5: 120.65,21 121.325,21
  other v6: 125.018,17.897 126.418,17.897
I\F\_\O\F\F\: SW6.2 SW7.3 SW7.6 U3.10 U5.2 U5.10 U6.2 U19.B2 U22.B2 U25.10 | length 98.2
  Top Layer w0.152: SW7.3@54.071,17.56 54.071,19.273 v3(54.077,19.279) 54.077,21.255 SW7.6@54.071,21.26 ; U5.10@60.922,19.291 v2(61.417,19.291) 61.608,19.291 62.008,18.891 U5.2@62.572,18.891 62.579,18.898 62.992,18.898 v2(63.195,18.694) ; U3.10@67.941,19.291 68.364,19.291 v2(68.504,19.431) ; U6.2@76.61,18.891 v2(77.14,18.891) ; v2(81.496,19.291) U25.10@81.979,19.291 ; v2(89.2,19.3) 89.212,19.3 89.375,19.137 89.375,14.867 90.117,14.125 90.117,11.883 90.678,11.322 90.678,4.572 89.829,3.723 SW6.2@89.829,3.44
  Top Layer w0.254: U22.B2@27.283,30.153 27.283,29.518 26.06,28.296 26.06,25.019 29.919,21.161 U19.B2@29.919,17.386
  Mid-Layer 1 w0.152: v3(29.921,19.304) 29.934,19.291 v2(61.417,19.291) ; v2(63.195,18.694) 64.44,18.694 65.176,19.431 v2(68.504,19.431) 68.58,19.355 70.256,19.355 70.72,18.891 v2(77.14,18.891) 77.54,19.291 v2(81.496,19.291) 81.953,19.291 82.448,18.796 85.395,18.796 85.899,19.3 v2(89.2,19.3)
IMCU_BOOT: SB46.2 U2.AL27 U6.15 | length 51.7
  Top Layer w0.125: U2.AL27@46.776,26.824 47.614,25.986 v3(47.614,10.095)
  Top Layer w0.152: U6.15@75.985,17.866 75.985,17.043 76.218,16.811 SB46.2@76.218,15.9 ; v2(76.218,12.845) 76.218,15.547
  Mid-Layer 1 w0.152: v3(47.614,10.095) 47.701,10.008 68.986,10.008 71.824,12.845 v2(76.218,12.845)
IMCU_LED: Q1.1 U2.AL29 | length 13.5
  Top Layer w0.125: U2.AL29@47.176,26.824 47.229,26.824 47.876,26.177 47.876,23.828 v3(47.981,23.724)
  Top Layer w0.152: v3(38.399,23.261) Q1.1@38.399,23.524
  Mid-Layer 1 w0.152: v3(38.399,23.261) 45.206,23.261 45.669,23.724 v3(47.981,23.724)
IMCU_N: D2.2 J2.2 TP10.1 U2.B4 | length 39
  Top Layer w0.122: J2.2@6.232,32.4 7.1,32.4 ccw(c7.1,33.105) D2.2@7.805,33.105 ; D2.2@8.08,33.105 ccw(c8.896,33.105) 8.896,32.289 12.312,32.289 ccw(c12.312,34.829) 14.108,33.033 14.434,33.359 cw(c16.534,31.26) 14.436,33.361 cw(c16.534,31.26) 14.603,33.516 cw(c16.534,31.26) 16.303,34.22 cw(c16.534,31.26) 16.534,34.229 39.6,34.229 cw(c39.6,34.118) 39.679,34.196 ccw(c39.791,34.309) 39.791,34.15 41.271,34.15 cw(c41.271,33.496) 41.734,33.958 41.845,33.847 cw(c41.349,33.35) 42.051,33.35 42.051,33.023 42.176,32.898 U2.B4@42.176,32.848
  Bottom Layer w0.129: v1(31.75,34.366) TP10.1@31.75,35.408
IMCU_P: D2.3 J2.3 TP9.1 U2.B2 | length 39.3
  Top Layer w0.122: J2.3@6.232,31.75 7.11,31.75 cw(c7.11,31.055) D2.3@7.805,31.055 ; D2.3@8.08,31.055 cw(c8.885,31.055) 8.88,31.86 cw(c8.885,31.055) 8.885,31.86 12.312,31.86 ccw(c12.312,34.829) 14.412,32.73 14.738,33.056 cw(c16.534,31.26) 16.534,33.8 v1@36.601,33.8 ; v1(36.601,33.68) v1@36.601,33.8 ; U2.B2@41.776,32.848 41.776,33.25 ccw(c41.175,33.25) 41.715,33.514 41.646,33.583 ccw(c41.121,33.058) 41.121,33.8 v1@36.601,33.8
  Bottom Layer w0.129: TP9.1@36.563,35.471 TP9.1@36.586,35.494 ; v1(36.601,33.68) TP9.1@36.601,35.408
IMCU_RESET: J4.10 R6.1 TP23.1 U2.AC31 | length 23.1
  Top Layer w0.152: U2.AC31@47.776,28.648 48.238,28.648 v3(48.311,28.575) ; v3(57.15,28.575) 57.15,36.474 58.033,37.358 58.033,39.223 R6.1@57.201,39.223 ; v1(58.039,39.218) 58.039,39.624 J4.10@59.055,40.64
  Mid-Layer 1 w0.152: v3(48.311,28.575) v3(57.15,28.575)
IMCU_SWDCLK: J4.4 TP48.1 U2.W31 | length 27.8
  Top Layer w0.125: U2.W31@47.795,29.429 U2.W31@47.776,29.448 v3(48.454,29.448)
  Top Layer w0.152: v3(57.861,29.515) 57.861,35.814 61.72,39.673 61.72,43.563 v1@61.138,44.145 ; J4.4@60.325,44.45 60.833,44.45 v1@61.138,44.145 ; v1@61.151,44.145 v1@61.138,44.145
  Mid-Layer 1 w0.152: v3(48.454,29.448) 48.692,29.21 57.125,29.21 57.429,29.515 v3(57.861,29.515)
  other v1: 61.151,44.12
IMCU_SWDIO: J4.2 TP21.1 U2.AA31 | length 24.7
  Top Layer w0.125: U2.AA31@47.776,29.048 v3(48.2,29.048)
  Top Layer w0.152: v3(57.506,28.931) 57.506,35.89 61.316,39.7 61.316,40.919 v1(60.325,41.91)
  Mid-Layer 1 w0.152: v3(48.2,29.048) 48.317,28.931 v3(57.506,28.931)
NetA2_1: A2.1 C91.2 L40.1 | length 1.5
  Top Layer w0.11: L40.1@134.575,52.935 C91.2@134.575,53.475 A2.1@134.575,54.4
NetC1_2: C1.2 L1.1 U1.L31 | length 2.8
  Top Layer w0.11: C1.2@120.363,38.389 U1.L31@119.278,38.389 120.933,38.389 L1.1@120.949,38.405
NetC5_2: C5.2 L3.1 U1.A15 | length 4.9
  Top Layer w0.225: L3.1@115.603,44.364 115.631,44.364 116.328,43.667 C5.2@116.328,43.364 ; U1.A15@115.878,40.589 115.878,40.789 ; C5.2@116.328,43.344 C5.2@116.328,43.364 ; 115.878,40.789 116.328,41.239 ; 115.878,40.789 116.328,41.239 ; 116.328,41.239 116.328,42.889 C5.2@116.328,43.364
NetC17_1: C17.1 R1.2 U1.A5 | length 10.3
  Top Layer w0.125: v1@108.179,42.774 v1(108.183,42.769)
  Top Layer w0.15: U1.A5@113.878,40.589 113.903,40.614 U1.A5@113.878,40.589
  Top Layer w0.2: C17.1@110.803,42.619 110.953,42.769 110.953,42.489 111.587,41.854 111.867,41.854 ; 111.867,41.854 113.178,41.854 ; 111.867,41.854 113.178,41.854 ; 113.178,41.854 113.878,41.155 ; 113.178,41.854 113.878,41.155 ; 113.878,41.155 U1.A5@113.878,40.589 113.878,41.155
  Top Layer w0.381: R1.2@107.874,42.774 v1@108.179,42.774
  Mid-Layer 2 w0.381: v1(108.183,42.769) v1(110.653,42.769)
NetC21_2: C21.2 L1.2 U13.5 | length 2.8
  Top Layer w0.11: L1.2@121.511,38.397 121.514,38.4 U13.5@123.225,38.4 123.221,38.396 C21.2@122.098,38.396
NetC22_1: C22.1 Q9.1 R8.2 U12.B2 | length 9.4
  Top Layer w0.203: v3(25.095,18.364) U12.B2@25.378,18.082 ; v3(31.928,19.66) 32.227,19.66 R8.2@32.258,19.629 ; Q9.1@32.254,18.384 C22.1@32.254,19.015 R8.2@32.254,19.625
  Mid-Layer 1 w0.152: v3(25.095,18.364) 25.451,18.72 28.575,18.72 29.515,19.66 v3(31.928,19.66)
NetC23_1: C23.1 J7.3 U50.1 | length 6.4
  Top Layer w0.11: U50.1@124.4,21.4 J7.3@124.4,27.815
NetC26_2: C26.2 C27.1 U2.A27 U2.G31 | length 7.5
  Top Layer w0.152: U2.G31@47.776,31.848 48.213,31.848 48.387,31.674 C27.1@49.141,31.674 v3(49.141,31.996)
  Top Layer w0.2: U2.A27@46.776,33.248 46.776,33.592 47.531,34.347 v3(48.151,34.347) 48.2,34.347 48.551,34.698 C26.2@48.551,35.098
  Mid-Layer 1 w0.152: v3(48.151,34.347) 48.151,32.986 v3(49.141,31.996)
NetC39_2: C39.2 U2.A15 | length 2.7
  Top Layer w0.225: C39.2@44.326,35.853 44.526,35.653 44.526,33.598 44.376,33.448 U2.A15@44.376,33.248
NetC40_1: C40.1 R10.2 U2.A5 | length 6
  Top Layer w0.15: U2.A5@42.376,33.248 U2.A5@42.401,33.273
  Top Layer w0.18: U2.A5@42.396,33.273 42.396,33.363
  Top Layer w0.2: C40.1@39.301,35.278 39.451,35.428 39.451,35.148 40.086,34.514 41.677,34.514 42.376,33.814 U2.A5@42.376,33.248
  Top Layer w0.3: R10.2@38.1,36.062 38.517,36.062 C40.1@39.151,35.428
NetC46_1: C46.1 J1.1 U26.6 | length 2
  Top Layer w0.11: J1.1@125.718,16.435 U26.6@125.718,18.447
NetC47_2: C47.2 C51.2 C52.2 D1.4 FB1.1 J3.1 TP15.1 | length 14.1
  Top Layer w0.508: v1(106.335,53.772) C51.2@106.335,52.897 106.971,52.897 107.657,52.21 D1.4@108.506,52.21 ; J3.1@110.529,57.268 110.529,56.816 v1(110.959,56.387) 113.562,56.387 113.809,56.634 FB1.1@114.852,56.634
  Bottom Layer w0.508: v1(106.335,53.772) 108.95,56.387 v1(110.959,56.387)
NetC49_1: C49.1 C53.2 C54.2 D2.4 FB2.1 J2.1 TP11.1 | length 29.8
  Top Layer w0.254: C53.2@9.297,29.058 9.297,30.522 D2.4@9.83,31.055
  Top Layer w0.508: v1(2.261,45.009) 4.275,42.994 4.275,39.025 5.573,37.727 FB2.1@7.264,37.727 7.264,36.881 7.264,33.731 v2(7.239,33.706) 6.583,33.05 J2.1@6.232,33.05 ; v2(8.738,28.498) C53.2@9.297,29.058
  Mid-Layer 1 w0.508: v2(7.239,33.706) 6.299,33.706 5.105,32.512 5.105,29.261 5.868,28.498 v2(8.738,28.498)
  Bottom Layer w0.508: TP11.1@1.346,45.923 v1(2.261,45.009)
NetC55_2: C55.2 FB5.1 J3.6@105.929,59.943 J3.6@106.029,57.493 J3.6@108.029,59.943 J3.6@110.429,59.943 J3.6@112.429,57.493 J3.6@112.529,59.943 R55.2 | length 3
  Top Layer w0.254: FB5.1@103.016,59.67 103.206,59.86 C55.2@103.854,59.86 105.845,59.86 J3.6@105.929,59.943
NetC56_2: C56.2 FB6.1 J2.6@3.557,28.45 J2.6@3.557,30.55 J2.6@3.557,32.95 J2.6@3.557,35.05 J2.6@6.007,28.55 J2.6@6.007,34.95 R56.2 | length 3.3
  Top Layer w0.508: FB6.1@3.146,25.317 3.146,28.039 J2.6@3.557,28.45
NetC58_1: C58.1 U8.33 | length 1.8
  Top Layer w0.152: C58.1@111.728,17.934 112.214,17.934 112.879,18.6 113.269,18.6 U8.33@113.278,18.609
NetC61_2: C61.2 D4.1 U11.4 U11.6 | length 5.2
  Top Layer w0.254: U11.4@21.701,19.718 22.284,19.718 22.45,19.885 22.45,20.57 22.301,20.718 U11.6@21.701,20.718
  Top Layer w0.508: D4.1@21.52,23.625 21.52,22.743 21.603,22.659 21.603,22.463 C61.2@21.607,22.459 ; C61.2@21.649,22.459 21.653,22.455 21.653,22.413 21.857,22.209 21.857,20.874
NetC62_1: C62.1 R60.1 R63.2 U11.3 | length 3.1
  Top Layer w0.152: R60.1@19.335,18.085 R60.1@19.36,18.085 ; C62.1@19.36,17.526 R60.1@19.36,18.085 ; U11.3@19.751,19.718 19.651,19.718 19.36,19.427 R60.1@19.36,18.085 ; R63.2@20.01,18.085 R60.1@19.36,18.085
NetC66_2: C66.2 D8.1 U7.4 U7.6 | length 4.3
  Top Layer w0.25: C66.2@23.75,13.875 D8.1@24.78,13.875
  Top Layer w0.254: U7.4@23.701,11.725 24.284,11.725 24.45,11.891 24.45,12.5 24.225,12.725 U7.6@23.701,12.725
  Top Layer w0.508: C66.2@23.704,13.871 23.708,13.875 C66.2@23.75,13.875 ; 23.751,12.875 C66.2@23.751,13.78
NetC69_1: C69.1 R38.1 R39.2 U7.3 | length 3.1
  Top Layer w0.152: C69.1@21.335,10.091 C69.1@21.36,10.091 ; R38.1@21.36,9.533 C69.1@21.36,10.091 ; U7.3@21.751,11.725 21.651,11.725 21.36,11.434 C69.1@21.36,10.091 ; R39.2@22.01,10.091 C69.1@21.36,10.091
NetC72_1: C72.1 U2.B6 | length 4.2
  Top Layer w0.187: C72.1@40.276,35.423 40.867,34.832 41.809,34.832 42.707,33.934 42.707,33.122 ; C72.1@40.576,35.423 C72.1@40.576,35.428 ; U2.B6@42.576,32.848 42.707,33.118
NetC73_1: C73.1 U2.A23 | length 1.2
  Top Layer w0.2: C73.1@45.81,34.348 45.81,33.889 45.976,33.723 U2.A23@45.976,33.248
NetC74_2: C74.2 U2.A13 | length 1.9
  Top Layer w0.225: U2.A13@43.976,33.248 C74.2@43.976,35.153
NetC76_1: C76.1 U8.29 | length 0.8
  Top Layer w0.152: C76.1@112.45,20.215 112.456,20.209 U8.29@113.278,20.209 U8.29@113.269,20.218
NetC84_2: C84.2 U8.14 | length 1.3
  Top Layer w0.2: U8.14@118.078,22.609 118.078,22.983 118.103,23.008 118.103,23.275 118.499,23.671 118.499,23.686 118.534,23.721 C84.2@118.549,23.721
NetC86_2: C86.2 U8.16 | length 1.1
  Top Layer w0.2: C86.2@117.275,23.721 117.275,23.382 117.253,23.36 117.253,23.008 117.278,22.983 U8.16@117.278,22.609
NetC87_2: C87.2 U8.19 | length 1.3
  Top Layer w0.2: C87.2@115.702,23.734 115.852,23.584 115.852,23.523 116.078,23.297 U8.19@116.078,22.609
NetC89_1: C89.1 L80.2 R81.1 | length 1
  Top Layer w0.11: L80.2@127.025,4.34 127.025,4.825 R81.1@127.025,5.34
NetC90_2: C90.2 L40.2 U13.3 | length 23.4
  Top Layer w0.11: U13.3@123.625,38.8 132.045,38.8 ccw(c132.045,41.34) 134.585,41.34 C90.2@134.585,51.775 ; C90.2@134.575,51.825 L40.2@134.575,52.365
NetC92_2: C92.2 R65.2 R66.2 SB8.2 SB10.2 U15.8 | length 17.7
  Top Layer w0.125: 91.85,27.463 91.887,27.5 ; C92.2@92.915,26.95 92.925,26.94 92.94,26.925 R66.2@93.59,26.925
  Top Layer w0.13: R65.2@95.425,18.79 96.94,18.79 97.3,19.15 97.3,25.45 97.4,25.55 v2(97.4,26.65)
  Top Layer w0.3: SB8.2@91.725,26.913 SB8.2@91.725,26.988 ; SB10.2@91.725,27.588 91.725,27.413 SB8.2@91.725,26.988 ; U15.8@92.895,25.89 C92.2@92.895,26.935 ; C92.2@92.925,26.94 C92.2@92.9,26.94 91.773,26.94 SB8.2@91.725,26.988
  Mid-Layer 1 w0.152: v2(92.9,26.65) v2(97.4,26.65)
NetC94_1: C94.1 J1.3 R81.2 | length 8.5
  Top Layer w0.11: J1.3@125.74,14.1 125.74,12.993 ccw(c127.993,12.993) 126.4,11.4 cw(c124.891,9.891) 127.025,9.891 127.025,7.672 R81.2@127.025,5.91
NetFB3_1: FB3.1 J3.5 TP16.1 | length 8.1
  Top Layer w0.508: v1(104.089,54.28) 104.1,54.291 105.345,54.291 ; FB3.1@105.345,52.417 105.345,54.291 ; J3.5@107.929,57.268 107.929,56.875 105.345,54.291
  Bottom Layer w0.508: TP16.1@103.347,53.857 103.769,54.28 v1(104.089,54.28)
NetFB4_1: FB4.1 J2.5 | length 1.7
  Top Layer w0.254: J2.5@6.232,30.45 6.609,30.45 6.985,30.074 6.985,29.864 FB4.1@7.413,29.435
NetL2_2: L2.2 U1.A21 | length 5.5
  Top Layer w0.225: 117.828,42.339 117.078,41.589 ; L2.2@118.378,43.464 117.903,42.989 117.903,42.414 117.078,41.589 ; 117.078,41.589 U1.A21@117.078,40.589 117.078,41.589
NetL3_2: L3.2 U1.B10 | length 4.9
  Top Layer w0.187: L3.2@114.378,44.414 113.928,43.964 113.928,42.438 114.835,41.531 U1.B10@114.835,40.232 ; U1.B10@114.835,40.232 U1.B10@114.878,40.189 ; U1.B10@114.835,40.232 U1.B10@114.878,40.189 ; U1.B10@114.835,40.232 U1.B10@114.878,40.189
NetL4_2: L4.2 U1.J1 | length 8.4
  Top Layer w0.187: L4.2@108.665,38.351 L4.2@109.09,38.351 ; L4.2@109.09,38.351 111.74,38.351 ; L4.2@109.09,38.351 111.74,38.351 ; 111.74,38.351 112.178,38.789 ; 111.74,38.351 112.178,38.789 ; 112.178,38.789 U1.J1@112.878,38.789 112.178,38.789
NetL5_1: L5.1 U8.26 | length 2.4
  Top Layer w0.254: L5.1@111.799,22.784 112.287,22.296 112.287,21.738 112.616,21.409 U8.26@113.278,21.409
NetL6_1: L6.1 U11.1 | length 2.6
  Top Layer w0.508: L6.1@17.399,21.369 19.151,21.369 U11.1@19.751,20.768